# Altium PCB SHT1x.PcbDoc
Units mm, origin at the board's own origin, x right, y up, seen from the top; angles counter-clockwise.
Board outline 14.99 x 18.67 mm, 4 copper layers (Top Layer, Internal Plane 1, Internal Plane 2, Bottom Layer); 4 components, 4 nets, 16 pads, 0 vias.
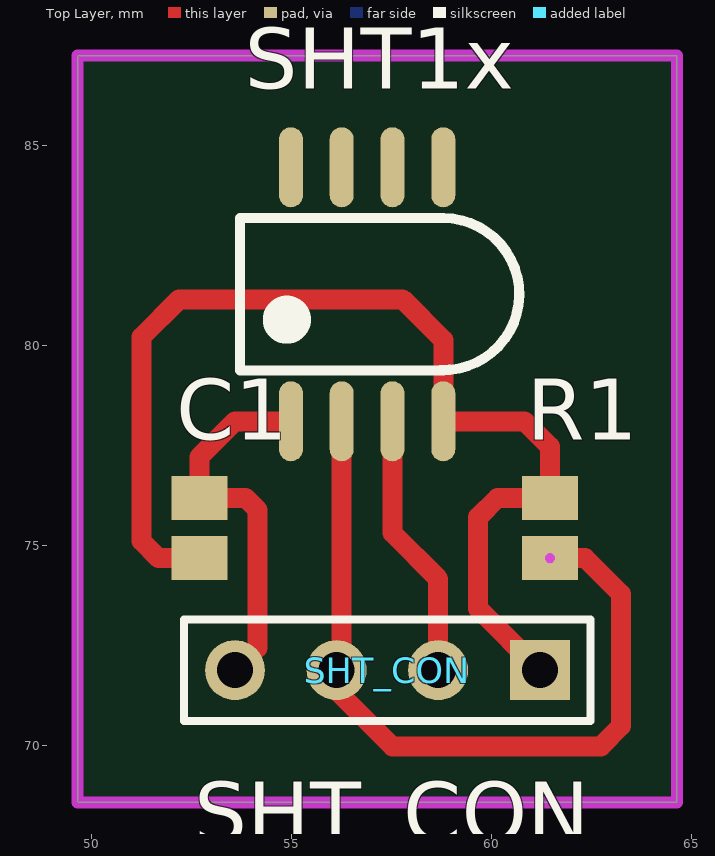
[diagram p0: Top Layer view]
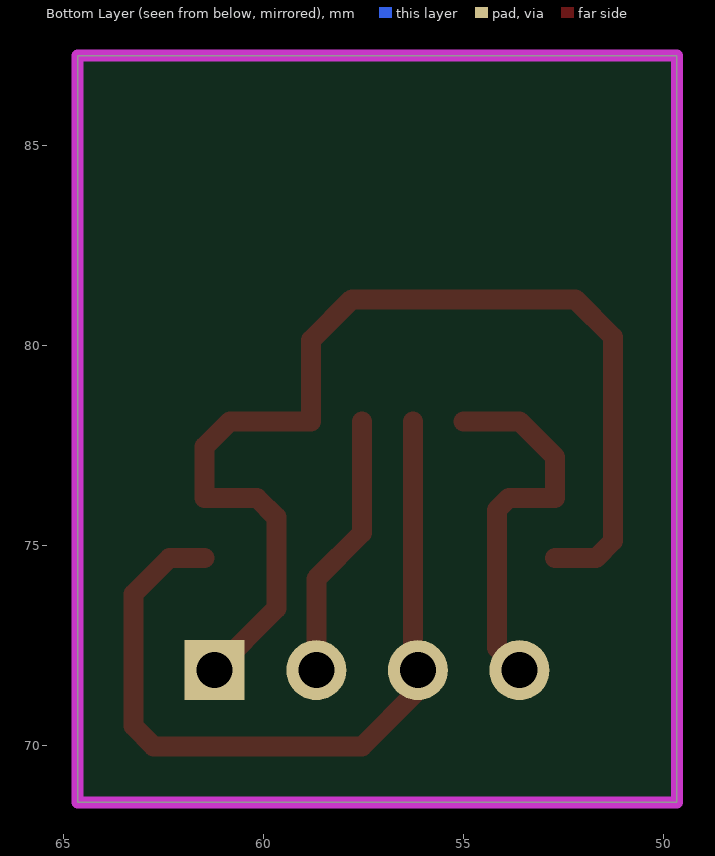
[diagram p1: Bottom Layer view, seen from below]
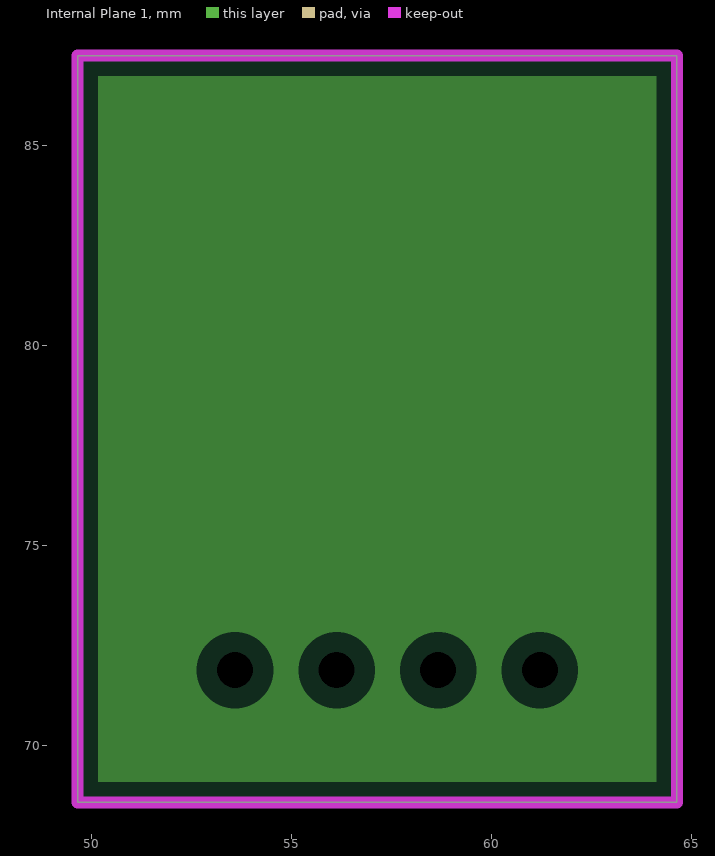
[diagram p2: Internal Plane 1, clearances drawn from the general rule]
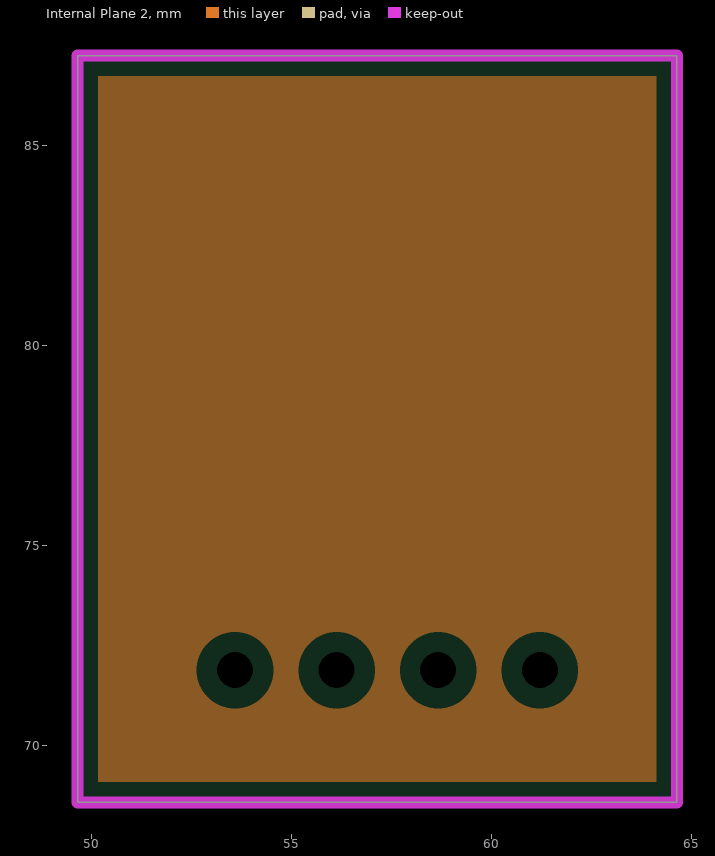
[diagram p3: Internal Plane 2, clearances drawn from the general rule]

## Layer stack, top to bottom
Top Layer: signal copper 0.0356
Dielectric: dielectric 0.32, FR-4, Dk 4.8
Internal Plane 1: plane copper 0.0356
Dielectric: dielectric 0.32, FR-4, Dk 4.8
Internal Plane 2: plane copper 0.0356
Dielectric: dielectric 0.32, FR-4, Dk 4.8
Bottom Layer: signal copper 0.0356

## Board outline
49.657,87.249 64.643,87.249 64.643,68.58 49.657,68.58

## Design rules (kind name [scope] priority, off if disabled: settings)
Clearance [All] p1: gap=0.5
PlaneClearance [All] p1: clearance=0.508
PlaneConnect [All] p1: planeconnectstyle=Relief reliefexpansion=0.508 reliefentries=4 reliefconductorwidth=0.254 reliefairgap=0.254
PolygonConnect [All] p1: connectstyle=Relief reliefconductorwidth=0.254 reliefentries=4 polygonreliefangle="90 Angle"
RoomDefinition SHT1x [InComponentClass('SHT1x')] p1: confinementstyle=ConfineIn formatcopy=TRUE lockcomponents=FALSE outline 66.929,77.724 94.996,77.724 94.996,91.186 66.929,91.186
RoutingVias [All] p1: holewidth=0.6 width=1 viastyle="Through Hole" minholewidth=0.711 minwidth=1.27 maxholewidth=0.711 maxwidth=1.27
SilkscreenOverComponentPads [IsPad] p1: minsilkscreentomaskgap=0.254
SolderMaskExpansion [All] p1: expansion=0.102
Width [All] p1: maxlimit=0.5 minlimit=0.5 preferedwidth=0.5
25 further rules are at their usual default settings.

## Components (designator, comment, footprint, x,y, rotation, side; value= is the part's Value field where it differs from the comment)
C1 "104" C0805 52.705,75.438 r270 top
R1 "10k" C0805 61.468,75.438 r90 top
SHT1x "SHT1x" SHT1x 56.261,81.915 r0 top
SHT_CON "SHTCON" HDR1X4 61.214,71.882 r180 top

## Footprints (in the part's own frame and the unit in brackets; to place one, negate y for a bottom-side part, rotate by r counter-clockwise, add the part's x,y. Pads: shape width x height; smd on the part's side, far side on the other; paste and mask are expansions set on the pad)
C0805 [mm] "Chip Capacitor, Body 2.0x1.3mm, IPC High Density"
  rect 1.1x1.4 smd: 1(-0.75,0) 2(0.75,0)
  body extent -1.1,-0.72 1.1,0.72, height 1.4
HDR1X4 [mm] "Connector; Header; 4 Position"
  rect 1.5x1.5 hole 0.9: 1(0,0)
  round 1.5 hole 0.9: 2(2.54,0) 3(5.08,0) 4(7.62,0)
  silkscreen extent -1.27,-1.27 8.89,1.27
SHT1x [mm] "Temperature_Humirity_Sensor"
  oval 0.6x2 smd mask+0.201: 1(-1.27,-3.81) 2(0,-3.81) 3(1.27,-3.81) 4(2.54,-3.81) 5(2.54,2.54) 6(1.27,2.54) 7(0,2.54) 8(-1.27,2.54)
  silkscreen extent -2.54,-2.54 4.44,1.27

## Part data
C1: library part CM, "Cap SMD"
R1: library part R, "Resistor 1/4W"
SHT_CON: library part "Header 4", "Header, 4-Pin"

## Nets (pads, with @x,y where several pads share a name; then routed paths per layer and width w, separated by ;. In a path a pad name is that pad's centre, name@x,y a point inside that pad or via, vN(x,y) a via of type N, cw(c..) or ccw(c..) an arc to the next point about the centre after c; other vN are vias at no path point)
3.3VDC: C1.2 R1.2 SHT1x.4 SHT_CON.1 | length 27.8
  Top Layer w0.5: C1.2 51.677,74.688 51.255,75.11 51.255,80.211 52.197,81.153 57.785,81.153 58.801,80.137 SHT1x.4 60.833,78.105 61.468,77.47 R1.2 60.154,76.188 59.674,75.708 59.674,73.422 SHT_CON.1
GND: C1.1 SHT1x.1 SHT_CON.4 | length 9.6
  Top Layer w0.5: SHT_CON.4@53.594,71.755 SHT_CON.4 54.155,72.443 54.155,75.893 53.86,76.188 C1.1 52.705,77.216 53.594,78.105 SHT1x.1
SCK: SHT1x.3 SHT_CON.2 | length 6.7
  Top Layer w0.5: SHT1x.3 57.531,75.311 58.674,74.168 SHT_CON.2
SDA: R1.1 SHT1x.2 SHT_CON.3 | length 20.3
  Top Layer w0.5: SHT_CON.3@56.007,71.755 SHT_CON.3 ; SHT1x.2 56.261,72.009 SHT_CON.3 ; R1.1 62.345,74.688 63.246,73.787 63.246,70.485 62.738,69.977 57.531,69.977 56.134,71.374 SHT_CON.3
pads on no net: SHT1x.5 SHT1x.6 SHT1x.7 SHT1x.8

## Polygon pours and split planes (outlines as drawn)
no net on Internal Plane 1 (split plane): 64.133,69.09 50.167,69.09 50.167,86.739 64.133,86.739
no net on Internal Plane 2 (split plane): 64.133,69.09 50.167,69.09 50.167,86.739 64.133,86.739

## Keep-outs
Top Layer:
  lines w0.254: 61.468,74.676 61.468,74.688
Keep-Out Layer:
  the board outline again, w0.3

## Silkscreen, mask and mechanical layers (free items; w line width, h text height)
Drill Drawing:
  text ".LEGEND" at 70.88,81.28 h1.52
  text "Drill Drawing." at 70.88,78.74 h1.52

## Dimensions
49.657,68.58 to 49.657,87.249 on Mechanical 1
49.657,68.58 to 64.643,68.58 on Mechanical 1